# Altium PCB fpga_board.PcbDoc (part 2 of 2)
Units mm, origin at the board's own origin, x right, y up, seen from the top; angles counter-clockwise.
Board outline 101.98 x 59.94 mm, 4 copper layers (Top Layer, Int1 (GND), Int2 (PWR), Bottom Layer), stack 1.565 mm thick; 79 components, 84 nets, 394 pads, 144 vias.
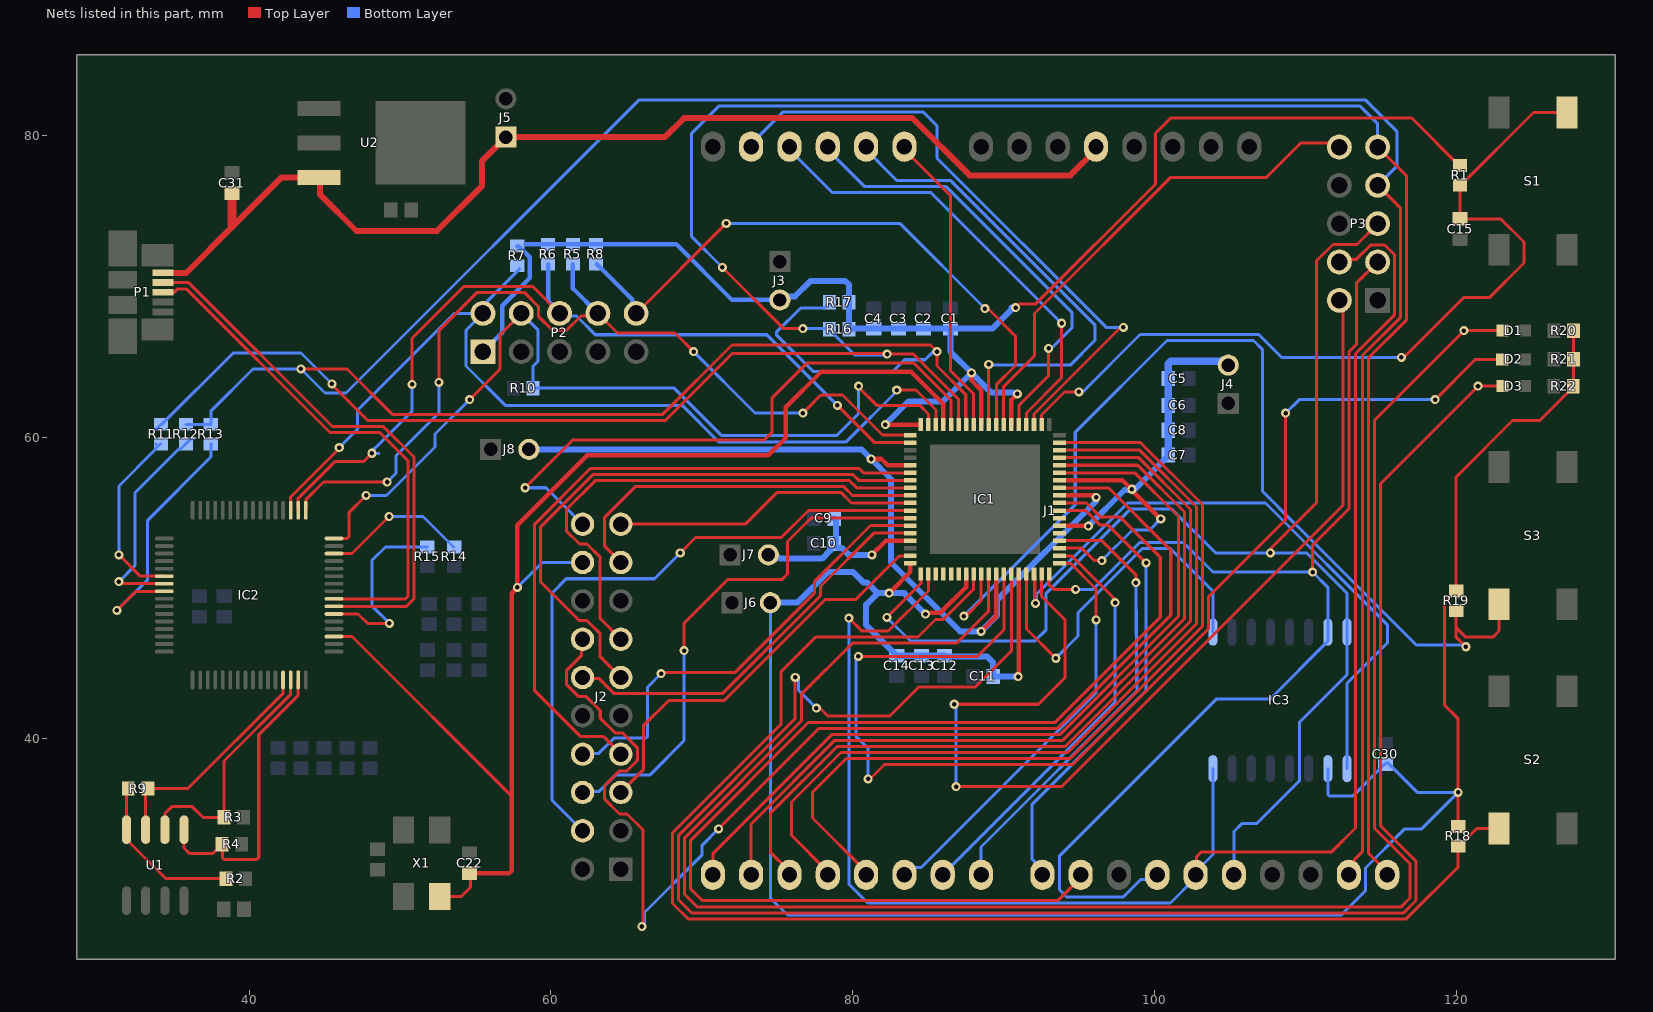
[diagram p4: the nets of this part, all layers, seen from the top]

## Via types
v1: diameter 0.6, hole 0.3, Top Layer to Bottom Layer, 144 vias

## Nets (pads, with @x,y where several pads share a name; then routed paths per layer and width w, separated by ;. In a path a pad name is that pad's centre, name@x,y a point inside that pad or via, vN(x,y) a via of type N, cw(c..) or ccw(c..) an arc to the next point about the centre after c; other vN are vias at no path point) (continued)
NetIC1_1: IC1.1 IC2.17 P2.8 R5.1 | length 60.5
  Top Layer w0.2: IC2.17@43.755,55.155 43.761,55.161 43.761,55.85 44.933,57.023 v1(49.149,57.023) ; v1(52.578,63.627) 52.578,67.056 55.118,69.596 58.233,69.596 59.173,68.656 59.173,68.014 60.113,67.074 61.045,67.074 61.994,68.023 62.943,68.023 P2.8@63.119,68.199 64.425,66.893 68.235,66.893 v1(69.469,65.659) ; v1(76.708,61.595) 77.025,61.912 77.897,62.784 79.329,62.784 81.98,60.133 IC1.1@83.827,60.133
  Bottom Layer w0.2: v1(49.149,57.023) 49.738,57.612 49.738,58.755 52.578,61.595 v1(52.578,63.627) ; v1(69.469,65.659) 73.533,61.595 v1(76.708,61.595)
  Bottom Layer w0.3: R5.1@61.468,71.471 61.468,69.85 P2.8@63.119,68.199
NetIC1_2: IC1.2 IC2.18 P2.6 R6.1 | length 58.4
  Top Layer w0.2: IC2.18@43.255,55.155 43.255,55.947 45.682,58.374 47.579,58.374 v1(48.133,58.928) ; v1(50.8,63.5) 50.8,66.548 54.248,69.996 58.782,69.996 P2.6@60.579,68.199 ; v1(78.994,62.103) 81.464,59.633 IC1.2@83.827,59.633
  Bottom Layer w0.2: 48.606,58.928 v1(48.133,58.928) 48.133,59.055 48.641,59.563 50.8,61.722 v1(50.8,63.5) ; P2.6@60.579,68.266 P2.6@60.579,68.199 60.755,68.023 61.704,68.023 62.943,66.784 74.313,66.784 v1(78.994,62.103)
  Bottom Layer w0.3: R6.1@59.817,71.471 59.817,69.028 P2.6@60.579,68.266
NetIC1_19: IC1.19 IC3.16 J1.28 P3.5 | length 90.4
  Top Layer w0.2: v1(82.274,48.048) 84.527,50.301 IC1.19@84.527,50.933 ; v1(107.696,52.324) 107.696,52.578 110.744,55.626 110.744,71.672 111.843,72.771 113.434,72.771 P3.5@114.808,74.145
  Bottom Layer w0.2: v1(82.274,48.048) 83.84,46.482 92.085,46.482 92.837,47.234 92.837,49.657 98.406,55.226 101.163,55.226 104.065,52.324 v1(107.696,52.324) 110.109,52.324 112.776,49.657 IC3.16@112.776,47.07 112.776,44.254 109.636,41.114 109.636,37.241 106.772,34.377 105.801,34.377 105.279,33.855 J1.28@105.279,30.988
NetIC1_20: IC1.20 IC3.8 J1.27 P3.4 | length 113.4
  Top Layer w0.2: v1(79.756,48.006) 80.607,47.155 82.386,47.155 85.027,49.796 IC1.20@85.027,50.933 ; J1.27@102.739,30.988 102.783,31.032 102.783,32.171 103.124,32.512 111.76,32.512 113.335,34.087 113.335,65.518 115.933,68.116 115.933,72.071 115.274,72.73 114.342,72.73 113.393,71.781 112.444,71.781 P3.4@112.268,71.605
  Bottom Layer w0.2: v1(79.756,48.006) 79.756,30.375 81.01,29.121 101.072,29.121 102.739,30.788 J1.27@102.739,30.988 102.739,31.188 103.886,32.335 IC3.8@103.886,38.02
NetIC1_33: IC1.33 IC3.9 | length 24.6
  Top Layer w0.2: IC1.33@91.527,50.933 91.527,47.284 v1(93.472,45.339)
  Bottom Layer w0.2: v1(93.472,45.339) 94.949,46.816 94.949,48.357 99.203,52.611 101.059,52.611 103.886,49.784 IC3.9@103.886,47.07
NetIC1_34: IC1.34 IC3.1 | length 42.4
  Top Layer w0.2: IC1.34@92.027,50.933 92.077,50.883 92.077,49.024 v1(92.127,48.974)
  Bottom Layer w0.2: v1(92.127,48.974) 92.188,49.035 92.188,49.574 98.24,55.626 107.373,55.626 115.443,47.556 115.443,46.355 112.776,43.688 IC3.1@112.776,38.02
NetIC1_35: IC1.35 P3.2 | length 68.2
  Top Layer w0.2: v1(86.741,42.291) 92.329,42.291 94.072,44.034 94.072,47.914 92.527,49.459 IC1.35@92.527,50.933 ; v1(86.868,36.83) 93.853,36.83 112.522,55.499 112.522,68.811 P3.2@112.268,69.065
  Bottom Layer w0.2: v1(86.741,42.291) 86.868,42.164 v1(86.868,36.83)
NetIC1_36: IC1.36 IC3.15 J1.26 P3.3 | length 81
  Top Layer w0.2: IC1.36@93.027,50.933 93.036,50.924 93.036,50.22 93.345,49.911 v1(94.788,49.911) ; v1(110.49,51.054) 110.49,52.832 112.922,55.264 112.922,65.67 113.393,66.141 113.393,70.19 P3.3@114.808,71.605
  Bottom Layer w0.2: v1(94.788,49.911) 95.937,49.911 99.037,53.011 101.929,53.011 103.886,51.054 v1(110.49,51.054) 111.506,50.038 IC3.15@111.506,47.07 111.506,46.47 107.667,42.631 104.099,42.631 93.726,32.258 93.726,29.972 94.177,29.521 97.948,29.521 99.099,30.672 99.883,30.672 J1.26@100.199,30.988
NetIC1_62: IC1.62 P2.10 R8.1 | length 41.7
  Top Layer w0.2: P2.10@65.659,68.199 v1(71.628,74.168) ; v1@88.9,68.707 88.773,68.58 v1(88.773,68.516) 88.973,68.516 90.805,66.684 90.805,64.746 89.527,63.468 IC1.62@89.527,60.833
  Bottom Layer w0.2: R8.1@62.992,71.471 R8.1@63.042,71.471 ; P2.10@65.382,68.476 P2.10@65.659,68.199 ; v1(71.628,74.168) 83.121,74.168 v1(88.773,68.516)
  Bottom Layer w0.3: R8.1@63.042,71.471 65.382,69.131 P2.10@65.382,68.476
NetIC1_66: IC1.66 J1.31 P3.7 R12.2 R13.2 R17.1 | length 211.6
  Top Layer w0.2: v1(43.434,64.516) 46.482,64.516 49.492,61.506 67.424,61.506 72.015,66.097 85.16,66.097 v1(85.598,65.659) 85.598,64.712 87.503,62.807 87.503,60.857 IC1.66@87.527,60.833 ; J1.31@112.899,30.988 112.899,31.567 113.261,31.929 113.261,31.981 113.792,32.512 113.792,65.409 116.333,67.95 116.333,75.16 P3.7@114.808,76.685
  Bottom Layer w0.2: R12.2@35.814,60.848 R13.2@37.415,60.848 ; R13.2@37.465,60.848 R13.2@37.415,60.848 ; R17.1@78.471,68.936 78.471,68.886 78.146,68.561 76.562,68.561 74.949,66.948 74.949,66.783 77.372,64.36 80.831,64.36 80.873,64.318 82.631,64.318 83.439,65.126 84.809,65.126 85.342,65.659 v1(85.598,65.659) ; P3.7@114.808,76.685 116.078,77.955 116.078,80.264 114.008,82.334 65.824,82.334 46.416,62.926 45.024,62.926 v1(43.434,64.516) 40.259,64.516 37.465,61.722 37.465,60.898 R13.2@37.415,60.848
NetIC1_67: IC1.67 J1.32 P3.9 R11.2 R16.1 | length 184
  Top Layer w0.2: v1(45.492,63.526) 45.492,63.474 47.86,61.106 67.589,61.106 72.015,65.532 82.204,65.532 v1@82.268,65.468 ; v1(71.374,71.247) 75.438,67.183 v1(76.708,67.183) ; v1(82.296,65.497) 84.04,65.497 87.027,62.51 IC1.67@87.027,60.833 ; P3.9@114.808,79.225 116.733,77.3 116.733,67.784 114.192,65.243 114.192,32.435 115.439,31.188 J1.32@115.439,30.988
  Bottom Layer w0.2: R11.2@33.747,60.523 33.838,60.523 R11.2@34.163,60.848 34.213,60.848 38.943,65.578 43.44,65.578 v1(45.492,63.526) ; v1(71.374,71.247) 69.336,73.285 69.336,80.131 71.139,81.934 113.646,81.934 114.808,80.772 P3.9@114.808,79.225 ; v1(76.708,67.183) 78.446,67.183 R16.1@78.471,67.158 78.471,67.108 80.139,65.44 82.239,65.44 v1(82.296,65.497)
NetIC1_70: IC1.70 IC2.19 P2.2 R7.1 | length 63.6
  Top Layer w0.2: IC2.19@42.755,55.155 42.755,56.029 45.974,59.248 v1(45.974,59.309) ; v1(82.931,63.119) 84.201,63.119 85.527,61.793 IC1.70@85.527,60.833
  Bottom Layer w0.2: v1(45.974,59.309) 47.18,60.515 47.18,61.785 53.594,68.199 P2.2@55.499,68.199 ; R7.1@57.933,71.161 55.776,69.004 55.776,68.476 P2.2@55.499,68.199 ; v1@83.006,63.119 79.577,59.69 71.12,59.69 68.707,62.103 56.981,62.103 54.374,64.71 54.374,67.074 P2.2@55.499,68.199
NetIC1_71: IC1.71 IC2.16 P2.4 R10.2 | length 58.4
  Top Layer w0.2: IC2.16@45.63,53.28 46.492,53.28 46.609,53.397 46.609,54.991 v1(47.752,56.134) ; v1(54.61,62.484) 56.624,64.498 56.624,66.784 P2.4@58.039,68.199 ; v1(80.4,63.382) 80.4,63.312 81.609,62.103 84.455,62.103 85.027,61.531 IC1.71@85.027,60.833
  Bottom Layer w0.2: v1(47.752,56.134) 49.109,56.134 52.324,59.349 52.324,60.198 v1(54.61,62.484) ; P2.4@58.039,68.199 59.164,67.074 59.164,65.047 58.816,64.699 R10.2@58.816,63.246 68.179,63.246 71.335,60.09 78.938,60.09 80.4,61.551 v1(80.4,63.382)
NetIC2_6: IC2.6 R15.2 | length 12.7
  Top Layer w0.2: IC2.6@45.63,48.28 47.224,48.28 47.876,47.628 49.273,47.628 v1(49.299,47.654)
  Bottom Layer w0.2: v1(49.299,47.654) 48.133,48.82 48.133,51.816 49.037,52.72 R15.2@51.816,52.72
NetIC2_7: IC2.7 P1.2 | length 36.3
  Top Layer w0.2: P1.2@34.283,70.246 34.298,70.231 35.999,70.231 45.524,60.706 48.895,60.706 50.927,58.674 50.927,49.276 50.431,48.78 IC2.7@45.63,48.78
NetIC2_8: IC2.8 P1.3 | length 35
  Top Layer w0.2: P1.3@34.283,69.596 35.038,69.596 35.273,69.831 35.833,69.831 45.358,60.306 48.66,60.306 50.527,58.439 50.527,49.442 50.365,49.28 IC2.8@45.63,49.28
NetIC2_14: IC2.14 R14.2 | length 9.8
  Top Layer w0.2: IC2.14@45.63,52.28 46.819,52.28 v1(49.276,54.737)
  Bottom Layer w0.2: v1(49.276,54.737) 51.527,54.737 53.544,52.72 R14.2@53.594,52.72
NetIC2_38: IC2.38 R11.1 | length 12.2
  Top Layer w0.2: v1(31.369,52.197) 32.786,50.78 IC2.38@34.38,50.78
  Bottom Layer w0.2: v1(31.369,52.197) 31.369,56.754 33.788,59.173 33.788,59.223 34.113,59.548 R11.1@34.163,59.548 ; R11.1@33.782,59.548 R11.1@33.832,59.548
NetIC2_39: IC2.39 R12.1 | length 14.8
  Top Layer w0.2: v1(31.369,50.419) 31.498,50.29 34.37,50.29 IC2.39@34.38,50.28
  Bottom Layer w0.2: v1(31.369,50.419) 32.424,51.474 32.424,56.3 35.347,59.223 35.489,59.223 36.139,59.873 36.315,59.873
NetIC2_40: IC2.40 R13.1 | length 17.3
  Top Layer w0.2: v1(31.242,48.514) 32.508,49.78 IC2.40@34.38,49.78
  Bottom Layer w0.2: v1(31.242,48.514) 33.274,50.546 33.274,54.483 37.465,58.674 R13.1@37.465,59.548 R13.1@37.515,59.548
NetIC2_61: IC2.61 R9.2 U1.3 | length 15.3
  Top Layer w0.2: U1.3@33.147,33.973 33.147,36.561 R9.2@33.289,36.703 35.941,36.703 42.255,43.017 IC2.61@42.255,43.905
NetIC2_62: IC2.62 R3.1 U1.2 | length 16.4
  Top Layer w0.2: U1.2@34.417,33.973 34.427,33.983 34.427,35.062 34.866,35.501 36.236,35.501 36.939,34.798 R3.1@38.339,34.798 38.339,38.535 42.755,42.951 IC2.62@42.755,43.905
NetIC2_63: IC2.63 R4.1 U1.1 | length 20.5
  Top Layer w0.2: U1.1@35.687,33.973 35.687,32.766 36.068,32.385 37.577,32.385 37.837,32.645 37.887,32.645 38.212,32.97 R4.1@38.212,33.02 38.227,33.005 38.227,32.121 38.344,32.004 40.513,32.004 40.64,32.131 40.64,40.271 43.255,42.886 IC2.63@43.255,43.905
NetR2_1: R2.1 R9.1 U1.4 | length 11.1
  Top Layer w0.2: R9.1@31.989,36.703 31.877,36.591 U1.4@31.877,33.973 31.877,33.323 34.466,30.734 R2.1@38.466,30.734
PB7B: IC1.17 J2.5 | length 27.4
  Top Layer w0.2: J2.5@64.643,36.445 64.643,36.449 66.135,37.941 66.135,40.862 67.818,42.545 71.501,42.545 78.186,49.23 80.218,49.23 83.102,52.114 83.808,52.114 IC1.17@83.827,52.133
PB18A: IC1.21
PB18B: IC1.22
PB22A: IC1.23
PB22B: IC1.24
PB29A: IC1.26 R18.1 S2.1 | length 92.9
  Top Layer w0.2: IC1.26@88.027,50.933 88.027,49.926 86.01,47.909 85.495,47.909 84.341,46.755 77.564,46.755 75.265,44.456 75.265,40.975 68.072,33.782 68.072,29.083 69.088,28.067 116.701,28.067 120.142,31.508 R18.1@120.142,32.878 120.192,32.878 121.372,34.058 S2.1@122.845,34.058
PB29B: IC1.27 R19.1 S3.1 | length 68.3
  Top Layer w0.2: 87.664,48.294 88.519,49.149 88.519,50.925 IC1.27@88.527,50.933 ; R19.1@120.065,48.499 R19.1@120.015,48.499 120.015,47.371 ; v1(120.65,46.101) 120.015,46.736 120.015,47.371 ; S3.1@122.845,48.917 122.845,47.153 122.428,46.736 120.65,46.736 120.015,47.371
  Bottom Layer w0.2: v1(87.376,48.133) 94.761,55.518 94.761,60.325 100.838,66.402 106.572,66.402 107.188,65.786 107.188,56.388 109.347,54.229 109.347,54.219 109.464,54.102 109.474,54.102 117.348,46.228 120.523,46.228 v1(120.65,46.101)
PB32A: D1.2 IC1.28 | length 125.9
  Top Layer w0.2: IC1.28@89.027,50.933 89.027,48.474 86.908,46.355 80.01,46.355 76.6,42.945 76.6,41.179 68.872,33.451 68.872,29.68 69.685,28.867 116.37,28.867 116.948,29.445 116.948,31.711 114.592,34.067 114.592,61.125 v1(120.523,67.056) D1.2@123.075,67.056
PB35A: D2.2 IC1.30 | length 81.5
  Top Layer w0.2: v1(80.391,45.466) 88.285,45.466 90.027,47.208 IC1.30@90.027,50.933 ; v1(81.034,37.338) 81.153,37.338 82.112,38.297 94.592,38.297 103.6,47.305 103.6,49.423 108.712,54.535 v1(108.712,61.595) ; v1(118.618,62.484) 121.285,65.151 D2.2@123.063,65.151
  Bottom Layer w0.2: v1(80.391,45.466) 80.218,45.293 80.218,40.178 81.034,39.362 v1(81.034,37.338) ; v1(108.712,61.595) 109.601,62.484 v1(118.618,62.484)
PB35B: D3.2 IC1.31 | length 129.5
  Top Layer w0.2: v1(76.2,44.069) 76.2,41.344 68.472,33.616 68.472,29.318 69.323,28.467 116.536,28.467 117.348,29.279 117.348,31.877 114.992,34.233 114.992,56.907 117.983,59.898 v1(121.458,63.373) D3.2@123.075,63.373 ; v1(77.597,42.037) 77.839,42.037 78.379,41.497 82.443,41.497 84.38,43.434 88.138,43.434 90.527,45.823 IC1.31@90.527,50.933
  Bottom Layer w0.2: v1(76.2,44.069) 76.405,43.864 76.405,43.229 v1(77.597,42.037)
PL25A: IC1.6 J2.7 | length 45
  Top Layer w0.2: J2.7@64.643,38.985 63.466,40.162 61.946,40.162 58.928,43.18 58.928,54.229 62.611,57.912 80.449,57.912 80.728,57.633 IC1.6@83.827,57.633
PL25B: IC1.7 J2.11 | length 38.6
  Top Layer w0.2: J2.11@64.643,44.065 63.271,45.437 63.271,46.957 62.4,47.828 61.899,47.828 59.328,50.4 59.328,54.063 62.777,57.512 80.029,57.512 80.408,57.133 IC1.7@83.827,57.133
PL27A: IC1.8 J2.13 | length 34.2
  Top Layer w0.2: J2.13@64.643,46.605 63.271,47.977 63.271,52.037 62.4,52.908 61.899,52.908 61.028,53.78 61.028,55.198 62.942,57.112 79.794,57.112 80.273,56.633 IC1.8@83.827,56.633
PL27B: IC1.9 J2.17 | length 24.8
  Top Layer w0.2: J2.17@64.643,51.685 63.568,52.76 63.568,54.678 65.602,56.712 79.423,56.712 80.001,56.134 83.826,56.134 IC1.9@83.827,56.133
PL29A: IC1.10 J2.19 | length 20.3
  Top Layer w0.2: J2.19@64.643,54.225 72.894,54.225 74.981,56.312 79.257,56.312 79.936,55.633 IC1.10@83.827,55.633
PL29B: IC1.11 J2.4 | length 42.6
  Top Layer w0.2: v1(68.58,52.324) 69.596,53.34 75.282,53.34 77.075,55.133 IC1.11@83.827,55.133
  Bottom Layer w0.2: J2.4@62.103,33.905 60.071,35.937 60.071,49.657 61.024,50.61 66.866,50.61 v1(68.58,52.324)
PL30A: IC1.12 J2.6 | length 35.1
  Top Layer w0.2: v1(68.834,45.847) 68.834,47.669 71.711,50.546 75.311,50.546 75.692,50.927 75.692,53.086 77.239,54.633 IC1.12@83.827,54.633
  Bottom Layer w0.2: J2.6@62.103,36.445 62.158,36.5 63.178,36.5 64.27,37.592 66.548,37.592 68.834,39.878 v1(68.834,45.847)
PL30B: IC1.13 J2.8 | length 30.4
  Top Layer w0.2: v1(67.31,44.323) 67.391,44.404 72.217,44.404 77.47,49.657 77.47,50.419 81.184,54.133 IC1.13@83.827,54.133
  Bottom Layer w0.2: J2.8@62.103,38.985 62.158,39.04 63.178,39.04 64.198,40.06 66.304,40.06 66.421,40.177 66.421,43.434 v1(67.31,44.323)
PL30C: IC1.14 J2.12 | length 26.9
  Top Layer w0.2: J2.12@62.103,44.065 62.158,44.01 63.178,44.01 64.198,42.99 71.369,42.99 77.87,49.491 77.87,50.096 81.407,53.633 IC1.14@83.827,53.633
PR2A: IC1.53 J1.19 | length 56.6
  Top Layer w0.2: J1.19@80.899,30.988 80.899,31.188 77.343,34.744 77.343,36.449 79.591,38.697 94.427,38.697 103.2,47.47 103.2,55.527 99.094,59.633 IC1.53@93.727,59.633
PR2B: IC1.52 J1.18 | length 55.9
  Top Layer w0.2: J1.18@78.359,30.988 78.359,31.188 75.946,33.601 75.946,35.814 79.229,39.097 94.261,39.097 102.8,47.636 102.8,55.361 99.028,59.133 IC1.52@93.727,59.133
PR2C: IC1.51 J1.17 | length 55.2
  Top Layer w0.2: J1.17@75.819,30.988 75.819,31.22 74.549,32.49 74.549,35.064 78.982,39.497 94.095,39.497 102.4,47.802 102.4,55.195 98.962,58.633 IC1.51@93.727,58.633
PR3A: IC1.50 J1.16 | length 54.3
  Top Layer w0.2: J1.16@73.279,30.988 73.279,34.359 78.817,39.897 93.93,39.897 102,47.967 102,55.03 98.897,58.133 IC1.50@93.727,58.133
PR3B: IC1.49 J1.15 | length 54.5
  Top Layer w0.2: J1.15@70.739,30.988 70.739,32.385 78.651,40.297 93.764,40.297 101.6,48.133 101.6,54.747 101.483,54.864 101.468,54.864 98.699,57.633 IC1.49@93.727,57.633
PR5A: IC1.47 J2.14 | length 82.4
  Top Layer w0.2: J2.14@62.103,46.605 62.048,46.55 62.048,45.53 61.028,44.51 61.028,43.62 61.853,42.795 62.353,42.795 63.276,41.873 63.276,41.372 64.246,40.401 64.747,40.401 65.735,39.413 65.735,38.557 65.054,37.876 64.554,37.876 63.568,36.89 63.568,36 64.554,35.014 65.054,35.014 66.119,33.95 66.119,27.638 v1(66.04,27.559) ; v1(71.12,34.036) 77.781,40.697 93.598,40.697 101.092,48.191 101.092,52.503 96.962,56.633 IC1.47@93.727,56.633
  Bottom Layer w0.2: v1(66.04,27.559) 66.213,27.732 66.213,28.494 70.031,32.312 70.031,32.947 v1(71.12,34.036)
PR12A: IC1.45 J1.24 | length 79.6
  Top Layer w0.2: IC1.45@93.727,55.633 95.514,55.633 96.456,54.691 97.748,54.691 100.396,52.044 100.396,48.06 93.433,41.097 77.084,41.097 69.272,33.285 69.272,30.042 70.047,29.267 93.598,29.267 95.119,30.788 J1.24@95.119,30.988
PR12B: IC1.44 J1.23 | length 31.3
  Top Layer w0.2: IC1.44@93.727,55.133 95.449,55.133 96.418,54.164 96.953,54.164 99.441,51.676 v1(99.461,51.656)
  Bottom Layer w0.2: J1.23@92.579,30.988 92.579,31.355 91.885,32.049 91.885,35.623 99.461,43.2 v1(99.461,51.656)
PR17A: IC1.43
PR17B: IC1.41
PR21A: IC1.40 J1.22 | length 30.2
  Top Layer w0.2: IC1.40@93.727,53.133 96.525,53.133 98.778,50.88 98.778,50.364 98.774,50.36 v1(98.774,50.356)
  Bottom Layer w0.2: J1.22@88.519,30.988 88.519,32.824 98.839,43.144 98.839,43.339 98.839,43.341 98.838,43.424 98.778,50.356 v1(98.774,50.356)
PR21B: IC1.38 J1.21 | length 27.9
  Top Layer w0.2: IC1.38@93.727,52.133 94.509,52.133 97.409,49.233 v1(97.409,49.022)
  Bottom Layer w0.2: J1.21@85.979,30.988 97.409,42.418 v1(97.409,49.022)
PR28A: IC1.37 J1.20 | length 27.7
  Top Layer w0.2: IC1.37@93.727,51.633 94.443,51.633 96.139,49.937 v1(96.139,47.879)
  Bottom Layer w0.2: J1.20@83.439,30.988 83.907,31.456 84.542,31.456 96.139,43.053 v1(96.139,47.879)
PROGN: IC1.61 P3.10 | length 33.2
  Top Layer w0.2: IC1.61@90.027,60.833 89.997,60.863 89.997,63.327 92.066,65.396 92.066,68.19 101.092,77.216 107.442,77.216 109.728,79.502 111.991,79.502 P3.10@112.268,79.225
PT23A: C22.2 IC1.69 IC2.3 J2.18 X1.1 | length 86.2
  Top Layer w0.2: IC2.3@45.63,46.78 46.819,46.78 57.404,36.195 ; X1.1@52.635,29.55 54.061,29.55 54.66,30.149 C22.2@54.66,31.075
  Top Layer w0.3: C22.2@54.61,31.075 54.66,31.075 57.228,31.075 57.404,31.251 57.404,36.195 57.404,49.657 v1(57.785,50.038) 57.785,54.161 62.424,58.8 74.422,58.8 75.565,59.943 75.565,61.976 77.906,64.317 83.896,64.317 86.027,62.186 IC1.69@86.027,60.833
  Bottom Layer w0.2: v1(57.785,50.038) 59.432,51.685 J2.18@62.103,51.685
PT23B: IC1.68 J2.20 | length 40.4
  Top Layer w0.2: v1(58.293,56.642) 61.468,59.817 74.168,59.817 74.676,60.325 74.676,62.611 76.962,64.897 84.074,64.897 86.527,62.444 IC1.68@86.527,60.833
  Bottom Layer w0.2: v1(58.293,56.642) 59.686,56.642 J2.20@62.103,54.225
PT28A: IC1.65 J1.9 | length 20.3
  Top Layer w0.2: J1.9@83.439,79.248 83.439,79.048 86.487,76 86.487,64.389 88.027,62.849 IC1.65@88.027,60.833
PT28B: IC1.63 J1.10 | length 32.9
  Top Layer w0.2: IC1.63@89.027,60.833 v1(89.027,64.816)
  Bottom Layer w0.2: J1.10@80.899,79.248 80.899,79.048 82.947,77 86.507,77 96.058,67.449 96.058,66.398 94.43,64.77 89.073,64.77 v1(89.027,64.816)
PT38A: IC1.59 J1.11 | length 29.8
  Top Layer w0.2: IC1.59@91.027,60.833 91.027,62.111 93.001,64.086 v1(93.001,65.876)
  Bottom Layer w0.2: J1.11@78.359,79.248 78.359,79.048 80.807,76.6 86.202,76.6 94.534,68.268 94.534,67.229 93.218,65.913 93.039,65.913 v1(93.001,65.876)
PT38B: IC1.58 J1.12 | length 30.9
  Top Layer w0.2: IC1.58@91.527,60.833 91.527,61.602 93.853,63.928 v1(93.853,67.547)
  Bottom Layer w0.2: J1.12@75.819,79.248 75.819,79.048 78.667,76.2 85.2,76.2 v1(93.853,67.547) v1@93.853,67.31
PT39A: IC1.57 J1.13 | length 41.9
  Top Layer w0.2: IC1.57@92.027,60.833 92.027,61.536 97.687,67.196 97.878,67.196 v1(97.954,67.273)
  Bottom Layer w0.2: J1.13@73.279,79.248 73.279,79.448 75.365,81.534 84.709,81.534 85.598,80.645 85.598,78.486 96.811,67.273 v1(97.954,67.273)
RESET: C15.2 IC1.56 R1.1 S1.1 | length 55.6
  Top Layer w0.2: IC1.56@92.527,60.833 92.527,61.47 94.049,62.992 v1(94.996,62.992) ; v1(116.374,65.278) 116.534,65.278 120.495,69.24 122.199,69.24 124.504,71.545 124.504,72.927 122.969,74.462 C15.2@120.269,74.462 R1.1@120.269,76.693 120.319,76.693 125.138,81.512 S1.1@127.345,81.512
  Bottom Layer w0.2: v1(94.996,62.992) 95.25,62.992 99.06,66.802 106.934,66.802 108.458,65.278 v1(116.374,65.278)
VBUS_5V: C31.2 J1.5 J5.1 P1.1 U2.3 | length 75.4
  Top Layer w0.2: 38.862,74.041 38.925,73.977
  Top Layer w0.3: J1.5@95.754,79.683 J1.5@95.754,79.883 ; J1.5@96.139,79.048 J1.5@96.139,79.248
  Top Layer w0.4: P1.1@34.283,70.896 34.308,70.871 35.819,70.871 38.925,73.977 42.16,77.212 U2.3@44.618,77.212 ; U2.3@44.704,77.126 44.704,76.073 47.117,73.66 52.451,73.66 55.446,76.655 55.446,78.306 J5.1@57.023,79.883 67.564,79.883 68.834,81.153 83.947,81.153 87.757,77.343 94.434,77.343 J1.5@96.139,79.048
  Top Layer w0.6: 38.862,74.041 C31.2@38.862,76.16
VCCIO_0: C1.2 C2.2 C3.2 C4.2 IC1.60 IC1.64 IC1.72 J3.2 P2.1 R1.2 R5.2 R6.2 R7.2 R8.2 R16.2 R17.2 | length 107.4
  Top Layer w0.2: v1(90.805,68.58) 91.059,68.834 92.144,68.834 100.076,76.766 100.076,80.137 101.092,81.153 117.059,81.153 120.219,77.993 R1.2@120.269,77.993
  Top Layer w0.3: v1(82.169,60.833) IC1.72@84.527,60.833 ; v1(87.884,64.262) 87.884,63.754 88.527,63.111 IC1.64@88.527,60.833 ; IC1.60@90.527,60.833 90.527,62.46 v1(90.932,62.865)
  Bottom Layer w0.2: J3.2@75.184,69.088 J3.2@75.413,69.317 ; R16.2@79.771,67.158 R16.2@79.796,67.183 ; v1@90.551,68.58 v1(90.805,68.58) ; v1@90.665,62.942 90.855,62.942 v1(90.932,62.865)
  Bottom Layer w0.3: P2.1@55.499,65.659 56.769,66.929 56.769,68.707 58.61,70.548 58.61,71.929 58.157,72.381 58.11,72.381 58.11,72.384 57.835,72.659 R7.2@57.785,72.659 ; 58.293,72.771 R6.2@59.817,72.771 R5.2@61.468,72.771 R8.2@62.992,72.771 68.326,72.771 72.009,69.088 J3.2@75.184,69.088
  Bottom Layer w0.4: J3.2@75.413,69.317 76.175,69.317 77.216,70.358 79.502,70.358 79.771,70.089 R17.2@79.771,68.936 R16.2@79.771,67.158 ; R16.2@79.796,67.183 C4.2@81.407,67.183 C3.2@83.058,67.183 C2.2@84.709,67.183 C1.2@86.487,67.183 ; v1(82.169,60.833) 83.693,62.357 85.979,62.357 v1(87.884,64.262) ; v1@90.551,68.58 90.551,68.463 89.271,67.183 C1.2@86.487,67.183 ; v1@90.665,62.942 89.204,62.942 v1(87.884,64.262) ; C1.2@86.487,67.183 86.487,65.659 v1(87.884,64.262)
VCCIO_1: C5.2 C6.2 C7.2 C8.2 IC1.39 IC1.42 IC1.48 J4.2 | length 35.4
  Top Layer w0.2: IC1.39@93.727,52.633 95.195,52.633 96.012,51.816 v1(96.52,51.816) ; v1@95.346,54.133 95.6,54.133 v1(95.631,54.102)
  Top Layer w0.3: IC1.42@93.727,54.133 v1@95.346,54.133 ; IC1.48@93.727,57.133 97.893,57.133 98.482,56.543 v1(98.516,56.543) 98.573,56.486 98.573,56.402 100.395,54.581 v1(100.428,54.581)
  Bottom Layer w0.2: v1(96.52,51.816) 98.552,53.848 99.695,53.848 v1(100.428,54.581) ; v1(98.516,56.543) 98.682,56.543 v1@98.7,56.526 ; C7.2@100.925,58.751 C7.2@100.925,58.801
  Bottom Layer w0.3: J4.2@104.351,65.024 104.605,64.77 J4.2@104.902,64.77
  Bottom Layer w0.4: v1(95.631,54.102) 98.023,56.494 v1@98.52,56.494 ; v1@98.7,56.526 C7.2@100.925,58.751
  Bottom Layer w0.5: C7.2@100.925,58.801 C8.2@100.925,60.452 C6.2@100.925,62.103 100.925,64.848 101.101,65.024 J4.2@104.351,65.024
VCCIO_2: C11.2 C12.2 C13.2 C14.2 C30.2 IC1.18 IC1.25 IC1.32 IC3.2 J6.2 R18.2 R19.2 R20.1 R21.1 R22.1 | length 160.3
  Top Layer w0.2: v1(84.836,48.26) 84.913,48.337 85.131,48.337 85.153,48.359 ; v1(90.98,44.117) v1@91.027,44.164 ; R18.2@120.092,34.178 R18.2@120.142,34.178 v1(120.142,36.449) 120.142,41.325 119.24,42.227 119.24,49.074 120.015,49.849 120.015,57.361 123.748,61.095 125.549,61.095 127.777,63.323 R22.1@127.777,63.373 127.792,63.388 R21.1@127.792,65.151 R20.1@127.792,67.056
  Top Layer w0.3: v1(82.423,49.657) 83.827,51.061 IC1.18@83.827,51.633 ; 85.153,48.359 85.824,48.359 87.527,50.062 IC1.25@87.527,50.933 ; v1@91.027,44.164 IC1.32@91.027,50.933
  Bottom Layer w0.2: J6.2@74.549,49.022 74.549,29.454 75.682,28.321 112.395,28.321 113.999,29.925 113.999,31.431 116.576,34.007 117.7,34.007 v1(120.142,36.449) 117.435,36.449 115.443,38.441 C30.2@115.316,38.314 115.266,38.314 113.147,36.195 111.623,36.195 111.506,36.312 IC3.2@111.506,38.02 ; C12.2@86.106,45.506 C12.2@86.146,45.466
  Bottom Layer w0.4: J6.2@74.549,49.022 76.342,49.022 78.374,51.054 80.036,51.054 80.735,50.355 80.962,50.355 81.661,49.657 ; v1(84.836,48.26) 83.439,49.657 v1(82.423,49.657) 81.661,49.657 ; C12.2@86.106,45.506 C13.2@84.582,45.506 C14.2@82.931,45.506 80.899,47.538 80.899,48.895 81.661,49.657 ; C12.2@86.146,45.466 88.9,45.466 89.321,45.045 C11.2@89.321,44.131 v1@90.867,44.131
VCCIO_3: C9.2 C10.2 IC1.15 J7.2 | length 12.5
  Top Layer w0.3: v1(81.28,52.197) 82.216,53.133 IC1.15@83.827,53.133
  Bottom Layer w0.4: J7.2@74.422,52.197 74.613,52.006 75.092,52.006 75.155,51.943 77.978,51.943 78.53,52.495 78.53,52.709 C10.2@78.78,52.959 ; C9.2@78.78,54.61 78.905,54.485 78.905,53.084 C10.2@78.78,52.959 ; v1(81.28,52.197) 79.742,52.197 79.28,52.659 79.03,52.659 78.78,52.909 C10.2@78.78,52.959
VCCIO_CORE: IC1.5 IC1.29 IC1.46 J8.2 | length 59.7
  Top Layer w0.2: IC1.46@93.727,56.133 IC1.46@93.728,56.134 ; v1@96.012,56.134 v1(96.139,56.007)
  Top Layer w0.3: v1(81.228,58.547) 81.915,58.547 82.329,58.133 IC1.5@83.827,58.133 ; v1(88.519,47.117) 89.527,48.125 IC1.29@89.527,50.933 ; IC1.46@93.728,56.134 v1@96.012,56.134
  Bottom Layer w0.2: v1@96.139,55.753 v1(96.139,56.007)
  Bottom Layer w0.4: J8.2@58.547,59.182 80.593,59.182 v1(81.228,58.547) 82.55,57.225 82.55,51.689 87.122,47.117 v1(88.519,47.117) 89.567,48.165 89.567,49.181 v1@96.139,55.753
pads on no net: IC1.3 IC1.4 IC2.21 IC2.22 IC2.23 IC2.24 IC2.26 IC2.27 IC2.28 IC2.29 IC2.30 IC2.32 IC2.33 IC2.34 IC2.36 IC2.41 IC2.43 IC2.44 IC2.45 IC2.46 IC2.48 IC2.52 IC2.53 IC2.54 IC2.55 IC2.57 IC2.58 IC2.59 IC2.60 IC3.3 IC3.4 IC3.5 IC3.6 IC3.11 IC3.12 IC3.13 IC3.14 J1.1 J1.2 J1.3 J1.14 J1.30 P1.4 S1.2 S1.3 S2.2 S2.3 S3.2 S3.3 U1.7 U2.2

## Polygon pours and split planes (outlines as drawn)
GND on Int1 (GND) (split plane): 130.046,25.91 29.085,25.91 29.085,84.834 130.046,84.834
3V3 on Int2 (PWR) (split plane): 130.046,25.91 29.085,25.91 29.085,84.834 130.046,84.834

## Other copper
Top Layer:
  region: 34.798,82.042
  region: 54.864,74.93
  region: 56.515,76.708
  region: 39.878,69.977

## Silkscreen, mask and mechanical layers (free items; w line width, h text height)
Top Overlay:
  lines w0.254: 89.916,80.518 89.916,75.438 90.424,74.93 94.742,74.93 94.996,75.184 94.996,80.518
  text "VIN" at 58.55,83.182 h1.2 r270
  text "FPGA_CONF" at 109.169,78.102 h1.2 r270
  text "A4" at 72.393,76.33 h1.2
  text "A0" at 82.553,76.33 h1.2
  text "GND" at 90.681,75.822 h1.2
  text "5V" at 96.771,75.441 h1.2 r90
  text "VIN" at 88.897,74.552 h1.2 r90
  text "3V3" at 99.184,74.298 h1.2 r90
  text "VCC_0" at 76.911,72.641 h1.2 r270
  text "JTAG" at 63.249,69.98 h1.2
  text "VCC_1" at 106.4,65.707 h1.2 r270
  text "VCC_CORE" at 53.978,60.909 h1.2
  text "20" at 60.963,56.137 h1.2
  text "19" at 64.138,56.137 h1.2
  text "FPGA_IO" at 58.623,55.242 h1.2 r270
  text "VCC_3" at 70.996,53.924 h1.2
  text "VCC_2" at 70.869,46.304 h1.2
  text "0" at 70.234,32.769 h1.2
  text "7" at 88.395,32.769 h1.2
  text "8" at 91.951,32.769 h1.2
  text "13" at 104.397,32.769 h1.2
  text "GND" at 108.453,32.767 h1.2 r91.06
  text "2" at 61.471,28.197 h1.2
  text "1" at 64.519,28.197 h1.2
  text "XKBoard FPGA 1.0" at 104.016,26.8 h1.2

## Text inside footprints (layer, text, board x,y; h text height)
P1: Mechanical 13 "PCB EDGE" at 29.77,75.506 h0.31 r270
P2: Top Overlay "10" at 67.389,67.829 h1.02; Top Overlay "9" at 67.389,65.129 h1.02; Top Overlay "1" at 53.369,65.129 h1.02; Top Overlay "2" at 53.069,67.829 h1.02
P3: Top Overlay "10" at 112.638,80.955 h1.02 r90; Top Overlay "9" at 115.338,80.955 h1.02 r90; Top Overlay "1" at 115.338,66.935 h1.02 r90; Top Overlay "2" at 112.638,66.635 h1.02 r90